# Altium PCB PyBoard_PCB.PcbDoc
Units mm, origin at the board's own origin, x right, y up, seen from the top; angles counter-clockwise.
Board outline 70.69 x 58.01 mm, 2 copper layers (Top Layer, Bottom Layer); 73 components, 78 nets, 257 pads, 65 vias.
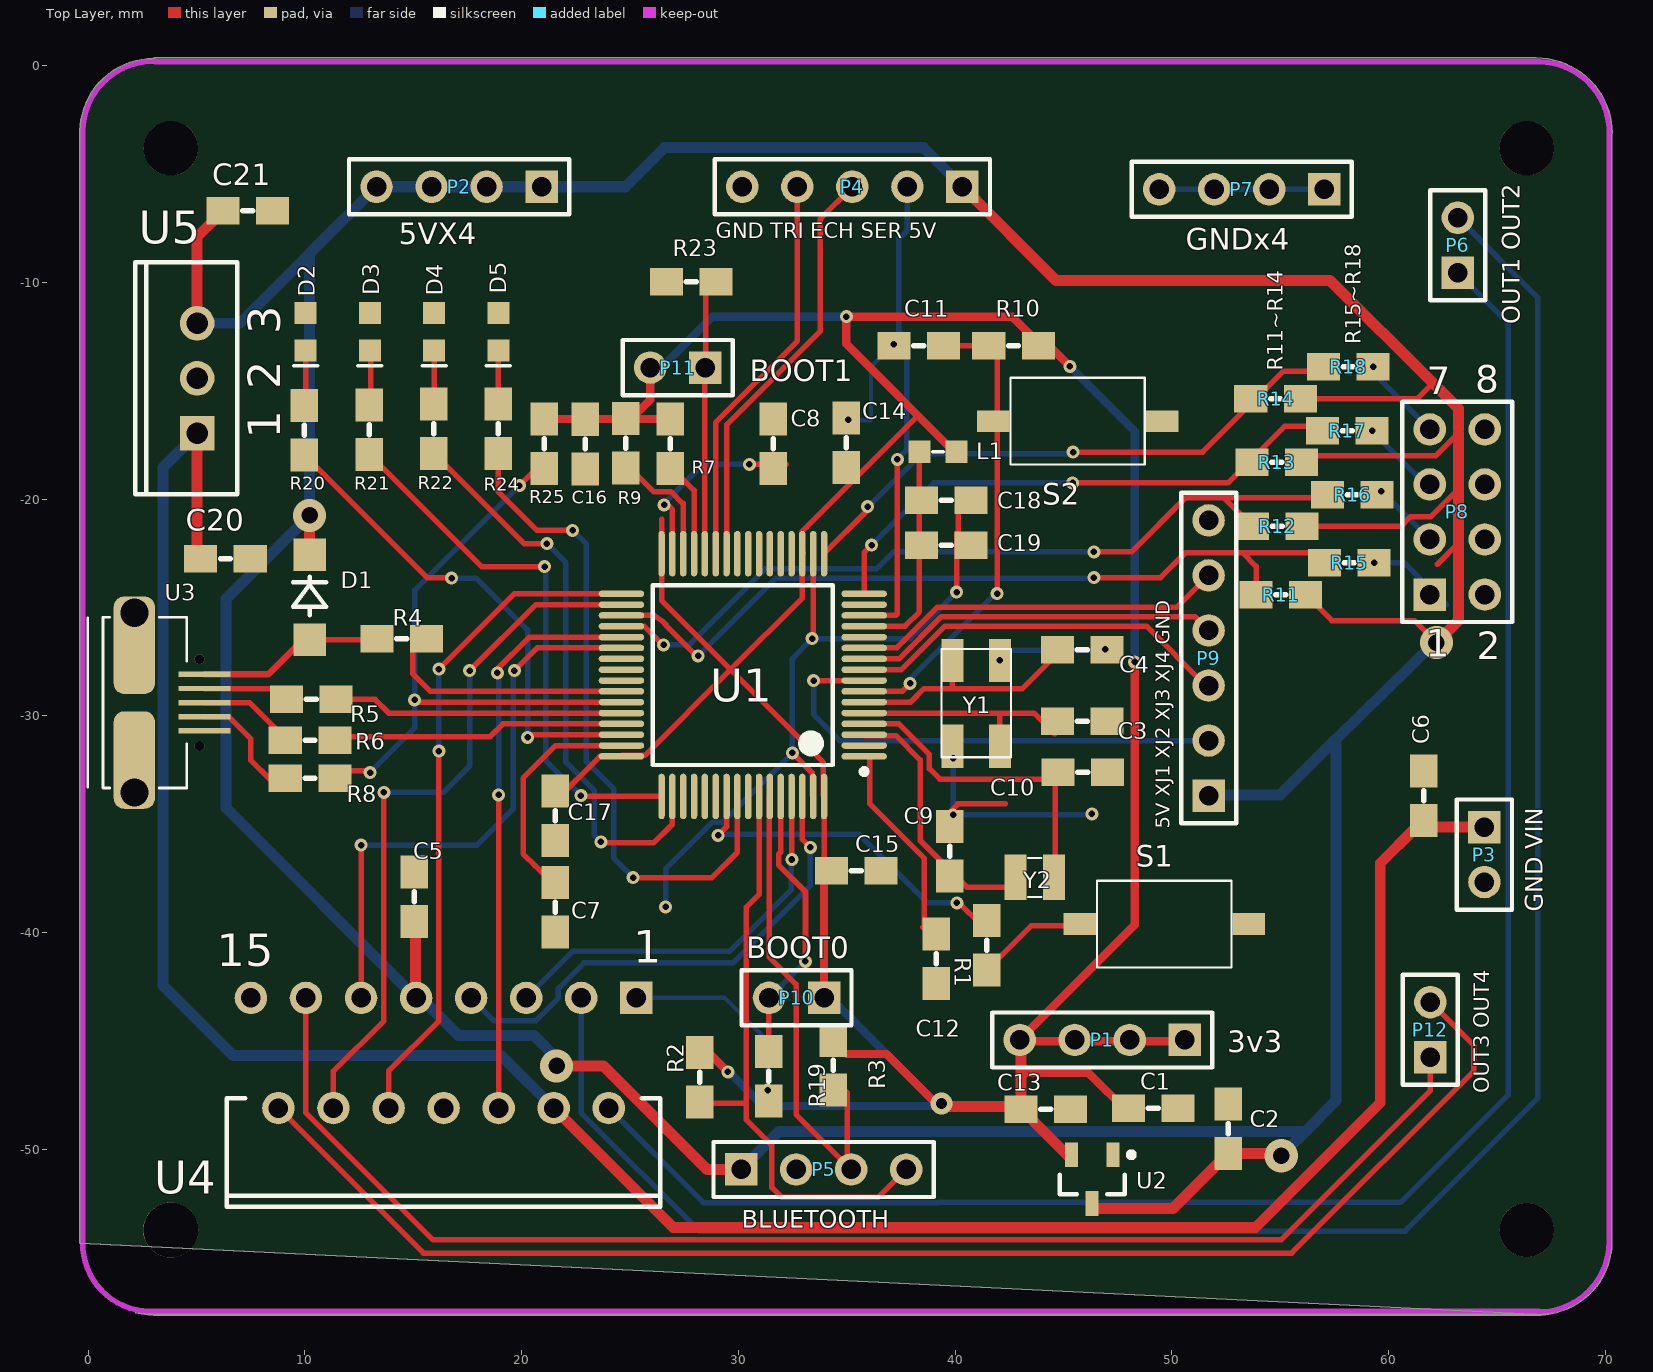
[diagram p0: Top Layer view]
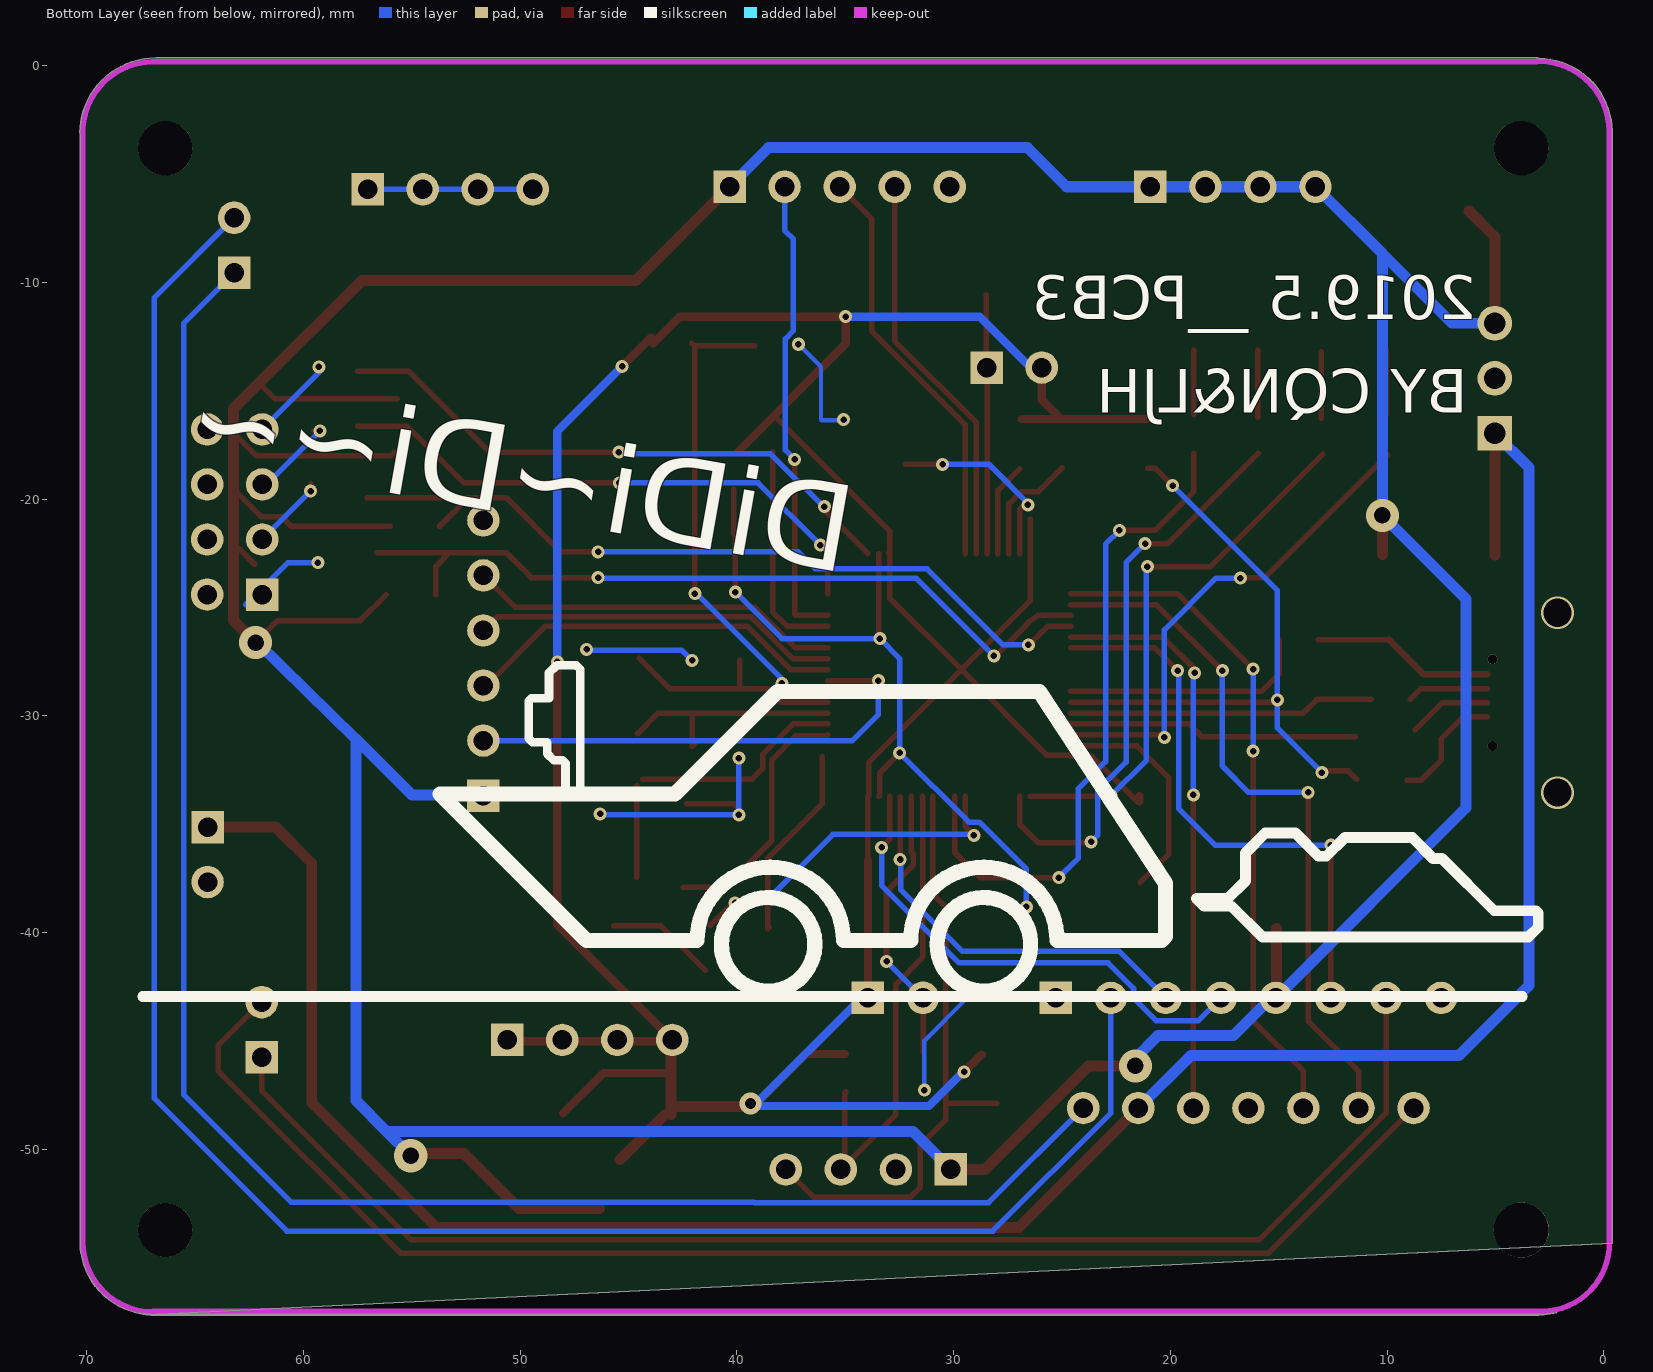
[diagram p1: Bottom Layer view, seen from below]

## Layer stack, top to bottom
Top Layer: signal copper 0.0356
Dielectric: dielectric 0.32, FR-4, Dk 4.8
Bottom Layer: signal copper 0.0356

## Board outline
-0.381,-54.323 cw(c-0.254,-54.319) -0.381,-54.319 -0.381,-2.997 cw(c-0.254,-2.997) -0.381,-2.995 cw(c3.01,-3.061) -0.286,-2.259 cw(c3.01,-3.061) 2.208,0.235 cw(c3.01,-3.061) 2.972,0.331 cw(c3.048,0.229) 3.03,0.355 cw(c3.048,0.229) 3.048,0.356 66.802,0.356 cw(c66.802,-3.175) 68.892,-0.329 cw(c66.916,-3.086) 70.075,-1.849 cw(c66.916,-3.086) 70.308,-3.086 cw(c66.916,-3.086) 70.308,-3.099 cw(c66.916,-3.086) 70.308,-3.151 cw(c66.916,-3.086) 70.308,-3.152 70.308,-3.151 70.308,-54.305 cw(c70.18,-54.305) 70.308,-54.308 cw(c66.916,-54.242) 70.212,-55.044 cw(c66.916,-54.242) 67.718,-57.537 cw(c66.916,-54.242) 66.878,-57.633 cw(c66.916,-54.242) 66.85,-57.633 cw(c66.853,-57.506) 66.773,-57.605 2.819,-57.605 cw(c2.819,-57.478) 2.817,-57.605 cw(c2.88,-54.344) 2.179,-57.53 ccw(c3.124,-54.127) 3.03,-57.657 ccw(c3.124,-54.127) 3.124,-57.658 ccw(c3.124,-57.531) 3.228,-57.605 3.048,-57.658 cw(c3.048,-57.531) 3.03,-57.657 cw(c3.048,-57.531) 2.944,-57.605 3.048,-57.658 66.802,-57.658 ccw(c66.802,-54.127) 67.718,-57.537 66.878,-57.633 cw(c66.802,-57.531) 66.802,-57.658 cw(c66.802,-57.531)

## Design rules (kind name [scope] priority, off if disabled: settings)
Clearance [All] p1: gap=0.178
PolygonConnect [All] p1: connectstyle=Relief reliefconductorwidth=0.254 reliefentries=4 polygonreliefangle="90 Angle"
RoutingVias [All] p1: holewidth=0.3 width=0.6 viastyle="Through Hole" minholewidth=0.2 minwidth=0.5 maxholewidth=1.27 maxwidth=3.81
SilkscreenOverComponentPads [All] p1: minsilkscreentomaskgap=0.254
SolderMaskExpansion [All] p1: expansion=0.102
TestPointUsage [All] p1: valid=0 allowmultiple=FALSE
Testpoint [All] p1: side=15 testpointundercomponent=TRUE minsize=1.016 maxsize=2.54 preferedsize=1.524 minholesize=0 maxholesize=1.016 preferedholesize=0.813 testpointgrid=0.025 style=1023 order=0123456789
Width [All] p1: maxlimit=0.508 minlimit=0.178 preferedwidth=0.203
23 further rules are at their usual default settings.

## Components (designator, comment, footprint, x,y, rotation, side; value= is the part's Value field where it differs from the comment)
C1 "4u7" SMD0805 50.275,-48.1 r180 top
C2 "2u2" SMD0805 52.596,-47.905 r270 top
C3 "18p" SMD0805 47,-30.25 r180 top
C4 "18p" SMD0805 47,-26.95 r180 top
C5 "100n" SMD0805 15.05,-37.2 r270 top
C6 "100n" SMD0805 61.625,-32.55 r270 top
C7 "4u7" SMD0805 21.55,-39.975 r90 top
C8 "4u7" SMD0805 31.6,-16.3 r270 top
C9 "2.2p" SMD0805 39.75,-35.1 r270 top
C10 "2.2p" SMD0805 47.025,-32.6 r180 top
C11 "104" SMD0805 37.175,-12.915 r0 top
C12 "104" SMD0805 39.125,-42.35 r90 top
C13 "2u2" SMD0805 45.325,-48.15 r180 top
C14 "104" SMD0805 34.975,-16.25 r270 top
C15 "104" SMD0805 36.575,-37.15 r180 top
C16 "104" SMD0805 22.936,-18.599 r90 top
C17 "104" SMD0805 21.55,-35.75 r90 top
C18 "4u7" SMD0805 38.445,-20.05 r0 top
C19 "104" SMD0805 38.445,-22.125 r0 top
C20 "0.33u" SMD0805 7.475,-22.75 r180 top
C21 "0.1u" SMD0805 8.5,-6.7 r180 top
D1 "Diode" "SS24 - SMALL" 10.211,-26.492 r90 top
D2 "LED RED" LED0603 10.025,-12.275 r90 top
D3 "LED GREEN" LED0603 12.992,-12.275 r90 top
D4 "LED Yellow" LED0603 15.958,-12.275 r90 top
D5 "LED Blue" LED0603 18.925,-12.275 r90 top
L1 "1uH" SMD0603 39.209,-17.813 r180 top
P1 "3v3" HDR1X4 50.596,-44.955 r180 top
P2 "5VX4" HDR1X4 20.921,-5.585 r180 top
P3 "GND VIN" HDR1X2 64.421,-35.13 r270 top
P4 "Header 5_SUPERVOICE" HDR1X5 40.336,-5.585 r180 top
P5 "BLUETOOTH" HDR1X4 30.121,-50.93 r0 top
P6 "OUT1 OUT2" HDR1X2 63.196,-9.555 r90 top
P7 "GNDx4" HDR1X4 57.035,-5.705 r180 top
P8 "Header 4X2_CARLIGHTS" HDR2X4 61.9,-24.4 r90 top
P9 "5V XJ1 XJ2 XJ3 XJ4 GND" HDR1X6 51.696,-33.68 r90 top
P10 "BOOT0" HDR1X2 33.951,-43.01 r180 top
P11 "BOOT1" HDR1X2 28.471,-13.93 r180 top
P12 "OUT3 OUT4" HDR1X2 61.925,-45.75 r90 top
R1 "10K" SMD0805 41.465,-41.729 r90 top
R2 "4K7" SMD0805 28.225,-45.525 r270 top
R3 "4K7" SMD0805 34.375,-44.975 r270 top
R4 "560" SMD0805 15.6,-26.45 r180 top
R5 "22" SMD0805 11.425,-29.235 r180 top
R6 "22" SMD0805 11.375,-31.125 r180 top
R7 "4K7" SMD0805 26.85,-16.3 r270 top
R8 "560" SMD0805 11.375,-32.875 r180 top
R9 "4K7" SMD0805 24.8,-16.275 r270 top
R10 "10K" SMD0805 41.55,-12.915 r0 top
R11 "4K7" SMD0805 56.175,-24.4 r180 top
R12 "4K7" SMD0805 56,-21.25 r180 top
R13 "4K7" SMD0805 55.975,-18.3 r180 top
R14 "4K7" SMD0805 55.925,-15.36 r180 top
R15 "50" SMD0805 57.05,-22.925 r0 top
R16 "50" SMD0805 57.175,-19.8 r0 top
R17 "50" SMD0805 56.95,-16.85 r0 top
R18 "50" SMD0805 57,-13.9 r0 top
R19 "10K" SMD0805 31.396,-45.491 r270 top
R20 "560" SMD0805 9.975,-15.675 r270 top
R21 "560" SMD0805 12.975,-15.65 r270 top
R22 "560" SMD0805 15.95,-15.6 r270 top
R23 "10K" SMD0805 28.975,-9.975 r180 top
R24 "560" SMD0805 18.925,-15.6 r270 top
R25 "10K" SMD0805 21.036,-18.585 r90 top
S1 "USER" "SW 3X6" 49.646,-39.605 r0 top
S2 "SW-PB" "SW 3X6" 45.65,-16.4 r0 top
U1 "STM32F405RGT6" LQFP64_M 30.201,-28.118 r180 top
U2 "XC6206" SOT-23_N 46.325,-51.375 r270 top
U3 "MicroUSB" MICROUSB -0.025,-29.388 r180 top
U4 "L298N" Multiwatt15V 16.396,-45.555 r180 top
U5 "LM7805" TO-220AB 5.025,-14.425 r90 top
Y1 "8M" SMD5032 40.973,-29.421 r270 top
Y2 "32K" TXC_9H03200019 43.675,-37.45 r0 top

## Footprints (in the part's own frame and the unit in brackets; to place one, negate y for a bottom-side part, rotate by r counter-clockwise, add the part's x,y. Pads: shape width x height; smd on the part's side, far side on the other; paste and mask are expansions set on the pad)
HDR1X2 [mm]
  rect 1.5x1.5 hole 0.9: 1(0,0)
  round 1.5 hole 0.9: 2(2.54,0)
  silkscreen extent -1.27,-1.27 3.81,1.27
HDR1X4 [mm]
  rect 1.5x1.5 hole 0.9: 1(0,0)
  round 1.5 hole 0.9: 2(2.54,0) 3(5.08,0) 4(7.62,0)
  silkscreen extent -1.27,-1.27 8.89,1.27
HDR1X5 [mm]
  rect 1.5x1.5 hole 0.9: 1(0,0)
  round 1.5 hole 0.9: 2(2.54,0) 3(5.08,0) 4(7.62,0) 5(10.16,0)
  silkscreen extent -1.27,-1.27 11.43,1.27
HDR1X6 [mm]
  rect 1.5x1.5 hole 0.9: 1(0,0)
  round 1.5 hole 0.9: 2(2.54,0) 3(5.08,0) 4(7.62,0) 5(10.16,0) 6(12.7,0)
  silkscreen extent -1.27,-1.27 13.97,1.27
HDR2X4 [mm]
  rect 1.5x1.5 hole 0.9: 1(0,0)
  round 1.5 hole 0.9: 2(0,-2.54) 3(2.54,0) 4(2.54,-2.54) 5(5.08,0) 6(5.08,-2.54) 7(7.62,0) 8(7.62,-2.54)
  silkscreen extent -1.27,-3.81 8.89,1.27
LED0603 [mil]
  rect 40x40 smd: 1(-34,0) 2(34,0)
  silkscreen extent -62,-22 -62,22
LQFP64_M [mm]
  oval 2.1x0.3 smd: 1(-5.6,3.75) 2(-5.6,3.25) 3(-5.6,2.75) 4(-5.6,2.25) 5(-5.6,1.75) 6(-5.6,1.25) 7(-5.6,0.75) 8(-5.6,0.25) 9(-5.6,-0.25) 10(-5.6,-0.75) 11(-5.6,-1.25) 12(-5.6,-1.75) 13(-5.6,-2.25) 14(-5.6,-2.75) 15(-5.6,-3.25) 16(-5.6,-3.75) 33(5.6,-3.75) 34(5.6,-3.25) 35(5.6,-2.75) 36(5.6,-2.25) 37(5.6,-1.75) 38(5.6,-1.25) 39(5.6,-0.75) 40(5.6,-0.25) 41(5.6,0.25) 42(5.6,0.75) 43(5.6,1.25) 44(5.6,1.75) 45(5.6,2.25) 46(5.6,2.75) 47(5.6,3.25) 48(5.6,3.75)
  oval 0.3x2.1 smd: 17(-3.75,-5.6) 18(-3.25,-5.6) 19(-2.75,-5.6) 20(-2.25,-5.6) 21(-1.75,-5.6) 22(-1.25,-5.6) 23(-0.75,-5.6) 24(-0.25,-5.6) 25(0.25,-5.6) 26(0.75,-5.6) 27(1.25,-5.6) 28(1.75,-5.6) 29(2.25,-5.6) 30(2.75,-5.6) 31(3.25,-5.6) 32(3.75,-5.6) 49(3.75,5.6) 50(3.25,5.6) 51(2.75,5.6) 52(2.25,5.6) 53(1.75,5.6) 54(1.25,5.6) 55(0.75,5.6) 56(0.25,5.6) 57(-0.25,5.6) 58(-0.75,5.6) 59(-1.25,5.6) 60(-1.75,5.6) 61(-2.25,5.6) 62(-2.75,5.6) 63(-3.25,5.6) 64(-3.75,5.6)
  silkscreen extent -5.72,-4.15 4.15,4.57, body extent -5,-5 5,5, height 1.6
MICROUSB [mm]
  rect 2.4x0.25 smd: 1(-5.4,-1.3) 2(-5.4,-0.65) 3(-5.4,0) 4(-5.4,0.65) 5(-5.4,1.3)
  rrect50% 1.9x4.5 smd: 6(-2.15,2.65) 7(-2.15,-2.65)
  round 0.457 hole 0.457 unplated: ""(-5.159,-2) ""(-5.159,2)
  silkscreen extent -4.57,-3.94 0,3.94
Multiwatt15V [mm] "TO, Thru-Hole, Vertical, Heatsink Mounted; 15 Bent Staggered Leads; Pitch 1.27 mm"
  rect 1.5x1.5 hole 0.9: 1(-8.89,-2.54)
  round 1.5 hole 0.9: 2(-7.62,2.54) 3(-6.35,-2.54) 4(-5.08,2.54) 5(-3.81,-2.54) 6(-2.54,2.54) 7(-1.27,-2.54) 8(0,2.54) 9(1.27,-2.54) 10(2.54,2.54) 11(3.81,-2.54) 12(5.08,2.54) 13(6.35,-2.54) 14(7.62,2.54) 15(8.89,-2.54)
  silkscreen extent -10,2.09 10,7.09
SMD0603 [mil]
  rect 40x40 smd: 1(-34,0) 2(34,0)
  silkscreen extent -10,0 10,0
SMD0805 [mil]
  rect 60x50 smd: 1(0,0) 2(90,0)
  silkscreen extent 36,0 54,0
SMD5032 [mm]
  rect 2x1 smd: 1(-1.98,-1.096) 2(1.98,-1.096) 3(1.98,1.096) 4(-1.98,1.096)
  silkscreen extent -2.51,-1.6 2.49,1.6, body extent -2.41,-1.52 2.41,1.52, height 0.8
SOT-23_N [mm]
  rect 1.15x0.6 smd: 1(-1.125,0.95) 2(-1.125,-0.95) 3(1.125,0)
  silkscreen extent -1.25,-1.5 0.7,1.93, body extent -0.7,-1.5 0.7,1.5, height 1.1
"SS24 - SMALL" [mm]
  rect 1.5x1.5 smd: 1(0,0) 2(3.937,0)
  silkscreen extent 1.14,-0.76 2.92,0.76, body extent -0.64,-0.89 4.57,0.89, height 3
"SW 3X6" [mm]
  rect 1.5x1 smd: 1(-3.9,0) 2(3.9,0)
  silkscreen extent -3.1,-2 3.1,2
TO-220AB [mm]
  rect 1.6x1.6 hole 1: 1(-2.54,0)
  round 1.6 hole 1: 2(0,0) 3(2.54,0)
  silkscreen extent -5.35,-1.85 5.35,2.85
TXC_9H03200019 [mm]
  rect 1x2.1 smd: 1(-0.889,0) 2(0.889,0)
  silkscreen extent -0.3,-0.9 0.3,0.9, body extent -1.4,-0.89 1.4,0.89, height 0.8

## Part data
C1 C2 C5 C6 C7 C8 C9 C10 C11 C12 C13 C14 C15 C16 C17 C18 C19 C20 C21: library part Cap, "Capacitor"
C3 C4: library part Cap
D1: "Default Diode"
D2: library part LED-RED, "红色发光二极管"
D3: library part LED-GREEN, "绿色发光二极管"
D4: library part LED-YELLOW, "黄色发光二极管"
D5: library part LED-BLUE, "蓝色发光二极管"
L1: library part Inductor, "Inductor"
P1 P2 P5 P7: library part "Header 4", "Header, 4-Pin"
P3 P6 P10 P11 P12: library part "Header 2", "Header, 2-Pin"
P4: library part "Header 5", "Header, 5-Pin"
P8: library part "Header 4X2", "Header, 4-Pin, Dual row"
P9: library part "Header 6", "Header, 6-Pin"
R1 R2 R3 R4 R5 R6 R7 R8 R9 R10 R11 R12 R13 R14 R15 R16 R17 R18 R19 R20 R21 R22 R23 R24 R25: library part Res, "Resistor"
S1: library part SW-PB, "Switch"
S2: "Switch"
U1: "ARM Cortex-M4 32-bit MCU+FPU, 210 DMIPS, 1024 kB Flash, 192 kB Internal RAM, 51 I/Os, 64-pin LQFP, -40 to 85 degC, Tray"
U4: "Dual Full Bridge Driver"
Y1: library part XTAL_SMD, "SMD5032 8M 4Pin有源晶振"
Y2: library part XTAL, "Crystal Oscillator"

## Free pads (board coordinates)
  round 2.5 hole 2.5: 2(66.37,-53.721) 4(3.81,-3.81) 5(66.37,-3.81)
  round 2.54 hole 2.54: 3(3.81,-53.721)

## Via types
v1: diameter 0.6, hole 0.3, Top Layer to Bottom Layer, 58 vias
v2: diameter 1.524, hole 0.762, Top Layer to Bottom Layer, 3 vias
v3: diameter 1.5, hole 1.3, Top Layer to Bottom Layer, 2 vias
v4: diameter 1.016, hole 0.508, Top Layer to Bottom Layer, 1 vias
v5: diameter 1.534, hole 0.762, Top Layer to Bottom Layer, 1 vias

## Nets (pads, with @x,y where several pads share a name; then routed paths per layer and width w, separated by ;. In a path a pad name is that pad's centre, name@x,y a point inside that pad or via, vN(x,y) a via of type N, cw(c..) or ccw(c..) an arc to the next point about the centre after c; other vN are vias at no path point)
3V3: C1.2 C13.2 C14.2 C15.2 C16.2 C17.2 L1.1 P1.1 P1.2 P1.3 P1.4 P10.1 P11.2 R2.1 R3.1 R7.1 R9.1 R10.2 R25.2 U1.19 U1.32 U1.48 U1.64 U2.2 | length 170
  Top Layer w0.254: C17.2@21.515,-33.962 23.609,-31.868 U1.48 24.646,-31.823 25.689,-31.823 29.644,-27.868 ; 26.451,-20.931 U1.32 26.451,-24.675 29.644,-27.868 ; U1.19@32.996,-22.473 U1.19 ; U1.64@33.905,-33.673 33.905,-32.129 29.644,-27.868 ; C15.2@33.951,-36.678 U1.64 ; 38.262,-16.163 32.951,-21.475 U1.19 ; 29.644,-27.868 32.951,-24.561 U1.19
  Top Layer w0.381: R25.2 R7.1@26.849,-16.299 ; C17.2@21.421,-33.941 C17.2@21.421,-33.697 ; R9.1@25.075,-16.275 25.931,-15.419 P11.2 ; R2.1@28.704,-45.621 v1(29.515,-46.431) ; P10.1 C15.2@33.951,-36.678 ; 35.01,-45.596 36.833,-45.596 v4@39.116,-47.879 ; v4(39.37,-47.879) v4@39.522,-48.031 ; L1.1@39.945,-17.813 34.976,-12.843 v1(34.976,-11.582) 40.361,-11.582 42.63,-11.582 R10.2@43.863,-12.815 ; P1.4@43.025,-45.005 P1.4 48.285,-39.645 v1(48.285,-27.508) ; P1.4@43.035,-45.014 48.056,-45.014 P1.1@50.537,-45.014 ; 43.06,-46.482 46.162,-46.482 C1.2@48.01,-48.33 ; R10.2@43.958,-12.538 v1(45.288,-13.868)
  Top Layer w0.5: v4@39.522,-48.031 C13.2@42.661,-48.031 ; C13.2@43.035,-48.405 P1.4@43.035,-45.014 ; C13.2@43.315,-48.405 U2.2@45.39,-50.479
  Bottom Layer w0.381: P11.2@26.45,-13.93 28.797,-11.582 v1(34.976,-11.582) ; v1(29.515,-46.431) 29.556,-46.431 31.131,-48.006 39.243,-48.006 P10.1@34.267,-43.03 ; v1(45.288,-13.868) 48.285,-16.866 v1(48.285,-27.508)
5V: C2.2 C5.2 C21.2 D1.2 P2.1 P2.2 P2.3 P2.4 P4.1 P5.1 P9.1 R11.1 R12.1 R13.1 R14.1 U2.3 U4.9 U5.3 | length 248
  Top Layer w0.254: R13.1@55.654,-17.985 R13.1@55.804,-17.835 ; R14.1@55.679,-15.36 R14.1 61.331,-15.36 62.044,-14.647 ; R13.1@55.975,-18.004 62.168,-18.004 63.221,-16.951 63.221,-16.789 ; R12.1 60.573,-21.25 61.018,-20.805 61.948,-20.805 63.195,-19.558 ; R11.1 57.378,-25.603 61.189,-25.603 v2(62.205,-26.619) ; 62.244,-23.008 63.221,-22.031
  Top Layer w0.5: U5.3 5.025,-7.889 C21.2
  Top Layer w0.508: D1.2 v2(10.211,-20.752) ; U4.9@15.096,-42.985 C5.2@15.096,-39.818 ; v2(21.615,-46.152) 23.774,-46.152 28.552,-50.93 P5.1 ; P4.1@40.959,-6.208 P4.1 44.657,-9.906 57.302,-9.906 62.044,-14.647 63.221,-15.824 63.221,-16.789 ; U2.3@46.34,-52.729 50.057,-52.729 C2.2 54.585,-50.191 54.686,-50.292 v5@54.762,-50.292 ; v2(62.205,-26.619) 63.221,-25.603 63.221,-22.031 63.221,-16.951
  Bottom Layer w0.5: U5.3 7.001,-11.885 10.211,-8.675
  Bottom Layer w0.508: v2(21.615,-46.152) 21.615,-45.796 20.574,-44.755 17.087,-44.755 15.347,-43.015 U4.9 6.35,-34.239 6.35,-24.613 v2(10.211,-20.752) 10.211,-8.675 P2.4 P2.3 P2.2 P2.1 24.551,-5.585 24.79,-5.585 26.591,-3.785 38.535,-3.785 P4.1 ; P5.1 31.876,-49.174 56.159,-49.174 ; P9.1@51.72,-33.655 54.991,-33.655 57.582,-31.064 ; v5(55.042,-50.292) 56.159,-49.174 ; v2@62.154,-26.594 57.582,-31.064 ; 56.159,-49.174 57.582,-47.752 57.582,-31.064
BOOT0: P10.2 R19.1 U1.60 | length 13
  Top Layer w0.254: R19.1 P10.2@31.396,-43.025 ; U1.60 31.951,-36.282 31.856,-36.376 31.856,-36.877 33.095,-38.116 v1(33.095,-41.326)
  Bottom Layer w0.254: P10.2 v1(33.095,-41.326)
GND: C1.1 C2.1 C3.1 C4.1 C5.1 C6.1 C7.1 C8.1 C9.1 C10.1 C11.1 C12.1 C13.1 C14.1 C15.1 C16.1 C17.1 C18.2 C19.2 C20.1 C21.1 D2.2 D3.2 D4.2 D5.2 P3.2 P4.5 P5.2 P7.1 P7.2 P7.3 P7.4 P8.2 P8.4 P8.6 P8.8 P9.6 R19.2 R23.2 S1.2 S2.2 U1.12 U1.18 U1.63 U2.1 U3.5 U3.6 U3.7 U4.1 U4.8 U4.15 U5.2 Y1.2 Y1.4 | length 72.8
  Top Layer w0.203: v1(31.345,-47.269) R19.2@31.396,-47.218 ; v1(37.16,-12.852) 37.16,-12.875 37.2,-12.915 C11.1@37.371,-12.915
  Top Layer w0.254: v1(32.487,-31.711) 33.405,-32.629 33.405,-33.673 U1.63 ; v1(33.4,-26.44) 33.451,-26.44 U1.18 ; v1(39.903,-34.569) 39.867,-34.533 39.867,-34.323 40.131,-34.059 42.317,-34.059 ; v1(40.072,-24.291) C19.2@40.072,-21.565 ; C19.2@40.138,-21.565 C18.2@40.138,-19.54
  Bottom Layer w0.203: U4.1 29.375,-43.015 31.345,-44.984 v1(31.345,-47.269) ; v1(35.077,-16.332) 35.103,-16.358 36.093,-16.358 36.119,-16.332 36.119,-13.894 v1(37.16,-12.852)
  Bottom Layer w0.254: v1(26.645,-38.811) 26.645,-37.067 28.807,-34.904 29.293,-34.904 v1(32.487,-31.711) 32.487,-30.074 32.487,-27.353 v1(33.4,-26.44) 37.923,-26.44 v1(40.072,-24.291) ; v1(39.903,-34.569) 46.253,-34.569 v1(46.304,-34.519) ; v1@39.903,-34.287 v1(39.903,-31.953) ; v1(42.069,-27.441) 42.549,-26.962 v1@46.872,-26.962 ; P7.4 P7.3 P7.2 P7.1
  other v1: 46.931,-26.937
  other v3: 2.134,-33.538 2.134,-25.238
L298N_OUT1: P6.1 U4.2 | length 84.3
  Bottom Layer w0.254: U4.2 28.38,-52.46 39.203,-52.46 39.211,-52.451 60.554,-52.451 65.515,-47.489 65.515,-11.875 P6.1
L298N_OUT2: P6.2 U4.3 | length 96.4
  Bottom Layer w0.254: U4.3 22.746,-48.317 28.201,-53.772 60.757,-53.772 66.878,-47.65 66.878,-10.697 P6.2
L298N_OUT3: P12.1 U4.13 | length 64
  Top Layer w0.254: U4.13 10.046,-48.317 15.907,-54.178 55.042,-54.178 61.925,-47.295 P12.1
L298N_OUT4: P12.2 U4.14 | length 65.4
  Top Layer w0.254: U4.14 15.469,-54.788 55.528,-54.788 63.932,-46.384 63.932,-45.217 P12.2
NetC3_2: C3.2 U1.5 Y1.3 | length 10.9
  Top Layer w0.254: U1.5 43.628,-29.868 C3.2@44.587,-30.827 ; Y1.3@41.936,-31.269 Y1.3 42.069,-29.912
NetC4_2: C4.2 U1.6 Y1.1 | length 12
  Top Layer w0.254: U1.6@36.844,-29.368 U1.6 37.95,-29.368 38.572,-28.746 43.101,-28.746 C4.2@44.512,-27.335 ; 39.877,-28.722 Y1.1 Y1.1@39.877,-27.528
NetC7_2: C7.2 U1.47 | length 10.5
  Top Layer w0.254: C7.2@21.396,-37.694 20.608,-36.906 20.066,-36.364 20.066,-32.868 21.566,-31.368 U1.47
NetC8_2: C8.2 U1.31 | length 9.1
  Top Layer w0.254: v1(26.568,-20.269) 26.568,-20.193 26.67,-20.193 26.951,-20.474 U1.31 ; v1(30.505,-18.39) C8.2@32.207,-18.39
  Bottom Layer w0.254: v1(26.568,-20.269) 26.568,-20.193 28.372,-18.39 v1(30.505,-18.39)
NetC9_2: C9.2 U1.3 Y2.1 | length 11.8
  Top Layer w0.254: U1.3 35.846,-30.913 37.263,-30.913 38.379,-32.029 38.379,-35.738 40.538,-37.897 41.25,-37.897 Y2.1@42.469,-37.897
NetC10_2: C10.2 U1.4 Y2.2 | length 14.2
  Top Layer w0.254: U1.4 37.404,-30.368 38.811,-31.775 38.811,-32.436 39.294,-32.918 C10.2@44.348,-32.918 ; Y2.2@44.612,-37.45 C10.2@44.612,-33.235
NetC11_2: C11.2 R10.1 S2.1 U1.7 | length 22.5
  Top Layer w0.254: U1.7 37.553,-28.868 v1(37.922,-28.499) ; C11.2@39.163,-12.915 R10.1@41.971,-12.915 ; v1(41.935,-24.359) 41.935,-12.95 R10.1@41.971,-12.915 ; R10.1@42.071,-12.815 R10.1@41.971,-12.915
  Bottom Layer w0.254: v1(37.922,-28.499) 37.922,-28.299 41.863,-24.359 v1(41.935,-24.359)
NetC18_1: C18.1 C19.1 L1.2 U1.13 | length 10.2
  Top Layer w0.254: U1.13@35.811,-25.857 37.694,-25.857 38.345,-25.206 L1.2
NetD2_1: D2.1 R20.1 | length 3
  Top Layer w0.254: R20.1@10.025,-16.111 D2.1
NetD3_1: D3.1 R21.1 | length 3.1
  Top Layer w0.254: R21.1@13.043,-16.271 D3.1@13.043,-13.19
NetD4_1: D4.1 R22.1 | length 3.1
  Top Layer w0.254: R22.1@15.958,-16.214 D4.1
NetD5_1: D5.1 R24.1 | length 3
  Top Layer w0.254: R24.1@18.925,-16.106 D5.1
NetP8_1: P8.1 R15.2 | length 4.4
  Bottom Layer w0.254: v1(59.336,-22.925) 60.72,-22.925 62.662,-24.867 ; P8.1 P8.1@61.9,-24.105
NetP8_3: P8.3 R16.2 | length 3.5
  Top Layer w0.254: v1(59.665,-19.625) R16.2@59.665,-19.292
  Bottom Layer w0.254: v1(59.665,-19.625) P8.3
NetP8_5: P8.5 R17.2 | length 3.8
  Top Layer w0.254: v1(59.236,-16.85) R17.2@59.522,-16.85
  Bottom Layer w0.254: v1(59.236,-16.85) P8.5@61.706,-19.32
NetP8_7: P8.7 R18.2 | length 3.7
  Bottom Layer w0.254: v1@59.286,-14.166 P8.7
  other v1: 59.286,-13.9
NetR1_1: R1.1 S1.1 | length 5.1
  Top Layer w0.254: R1.1 43.514,-39.68 S1.1@45.671,-39.68
NetR5_2: R5.2 U3.2 | length 3.8
  Top Layer w0.254: U3.2 8.44,-28.738 R5.2@8.937,-29.235
NetR6_2: R6.2 U3.3 | length 3.8
  Top Layer w0.254: U3.3 7.442,-29.388 R6.2@8.687,-30.632
NetR8_2: R8.2 U3.4 | length 5.5
  Top Layer w0.254: U3.4 6.481,-30.038 7.493,-31.05 7.493,-32.041 8.421,-32.969 R8.2@9.068,-32.969
PA0_X1_SERVO: P4.2 U1.14 | length 21.9
  Top Layer w0.254: U1.14 37.269,-25.368 37.338,-25.298 v1(37.338,-18.161)
  Bottom Layer w0.254: v1(37.338,-18.161) 37.765,-17.734 37.765,-12.602 37.389,-12.226 37.389,-8.001 37.796,-7.594 P4.2 ; P4.2@37.492,-5.815 P4.2@37.567,-5.815
PA1_X2: U1.15
PA2_X3_LEFTL: R13.2 R17.1 U1.16 | length 26
  Top Layer w0.254: U1.16 35.801,-22.467 v1(36.144,-22.123) ; v1(45.415,-19.253) 52.594,-19.253 53.862,-17.985 55.207,-16.64 R17.1@57.496,-16.64
  Bottom Layer w0.254: v1(36.144,-22.123) 39.014,-19.253 v1(45.415,-19.253)
PA3_X3_RIGHTL: R14.2 R18.1 U1.17 | length 26.9
  Top Layer w0.254: U1.17 v1@35.966,-20.502 ; v1(45.441,-17.831) 51.416,-17.831 53.887,-15.36 55.157,-14.09 R18.1@57.496,-14.09
  Bottom Layer w0.254: v1(35.966,-20.345) 36.009,-20.345 38.447,-17.907 v1@45.39,-17.907
PA4_X5: U1.20
PA5_X6: U1.21
PA6_X7: U1.22
PA7_X8: U1.23
PA8_SDIO_SW: U1.41
PA9_VSUB: R4.1 U1.42 | length 11.5
  Top Layer w0.254: R4.1@14.979,-26.485 14.979,-28.06 15.773,-28.854 U1.42@24.587,-28.854
PA10_ID: R8.1 R25.1 U1.43 | length 29
  Top Layer w0.254: R8.1@11.392,-32.931 11.397,-32.931 11.791,-32.537 12.929,-32.537 v1(13.005,-32.614) ; v1(15.062,-29.261) 15.169,-29.368 U1.43 ; v1(19.888,-19.38) 20.683,-18.585 R25.1
  Bottom Layer w0.254: v1(13.005,-32.614) 15.062,-30.556 v1(15.062,-29.261) 15.062,-24.206 v1(19.888,-19.38)
PA11_DM: R5.1 U1.44 | length 14.1
  Top Layer w0.254: R5.1@10.729,-29.235 13.232,-29.235 13.865,-29.868 U1.44
PA12_DP: R6.1 U1.45 | length 13.4
  Top Layer w0.254: R6.1@11.455,-30.963 18.542,-30.963 19.137,-30.368 U1.45
PA13_P5_RED: R20.2 U1.46 | length 22.9
  Top Layer w0.254: R20.2 15.636,-23.622 v1@16.662,-23.622 ; v1(20.269,-30.988) 20.389,-30.868 U1.46
  Bottom Layer w0.254: v1(16.764,-23.647) 17.882,-23.647 20.269,-26.035 v1(20.269,-30.988)
PA14_P4_GRN: R21.2 U1.49 | length 25.2
  Top Layer w0.254: R21.2 18.153,-23.114 v1(21.057,-23.114) ; v1(22.733,-33.68) 22.77,-33.718 U1.49
  Bottom Layer w0.254: v1@21.107,-23.114 21.107,-32.055 v1(22.733,-33.68)
PA15_P3_YEL: R22.2 U1.50 | length 26.7
  Top Layer w0.254: R22.2 20.111,-22.047 v1(21.158,-22.047) ; v1(23.647,-35.814) 23.698,-35.865 26.086,-35.865 26.951,-35 U1.50
  Bottom Layer w0.254: v1(21.158,-22.047) 22.039,-22.928 22.039,-32.131 23.338,-33.43 23.338,-35.504 v1(23.647,-35.814)
PB0_Y11_ECHO: P4.3 U1.26 | length 19.3
  Top Layer w0.254: U1.26 29.451,-16.574 33.771,-12.254 33.771,-7.07 P4.3
PB1_Y12_TRIG: P4.4 U1.27 | length 18.5
  Top Layer w0.254: U1.27 28.951,-16.464 32.716,-12.698 P4.4
PB2_BOOT1: P11.1 R23.1 U1.28 | length 11.9
  Top Layer w0.254: U1.28 P11.1@28.451,-13.95 ; P11.1@28.484,-13.916 R23.1@28.484,-10.566
PB3_X17_SW: R1.2 U1.55 | length 15.8
  Top Layer w0.254: v1(29.058,-35.509) 29.451,-35.116 U1.55 ; v1(40.081,-38.633) 40.186,-38.633 R1.2@41.232,-39.68
  Bottom Layer w0.254: v1@29.104,-35.463 35.565,-35.463 38.735,-38.633 v1(40.081,-38.633)
PB4_P2_BLUE: R24.2 U1.56 | length 31
  Top Layer w0.254: R24.2 18.925,-19.662 20.701,-21.438 v1(22.352,-21.438) ; v1(25.146,-37.465) 28.778,-37.465 29.951,-36.293 U1.56
  Bottom Layer w0.254: v1(22.352,-21.438) 22.987,-22.073 22.987,-32.106 24.252,-33.371 24.252,-36.571 v1(25.146,-37.465)
PB5: U1.57
PB6_X9_TX: P5.4 R2.2 U1.58 | length 28
  Top Layer w0.254: R2.2@28.016,-47.868 30.345,-47.868 ; U1.58 30.951,-38.239 30.356,-38.834 30.356,-46.137 30.356,-48.625 31.547,-49.816 31.547,-51.765 32.004,-52.222 34.442,-52.222 36.448,-52.222 P5.4
PB7_X10_RX: P5.3 R3.2 U1.59 | length 22.2
  Top Layer w0.254: U1.59 31.425,-33.744 31.425,-41.147 32.664,-42.387 32.664,-48.394 P5.3@35.01,-50.739 ; R3.2@34.968,-47.346 35.01,-47.388 P5.3@35.01,-50.739 ; P5.3 P5.3@35.01,-50.739
PB8_Y3: U1.61 U4.5 | length 18.5
  Top Layer w0.254: v1(32.461,-36.627) U1.61@32.461,-33.728
  Bottom Layer w0.254: U4.5 22.352,-40.869 29.591,-40.869 32.436,-38.024 v1@32.436,-36.678
PB9_Y4: U1.62 U4.7 | length 23.2
  Top Layer w0.254: U1.62 32.951,-35.694 v1(33.325,-36.068)
  Bottom Layer w0.254: U4.7 18.72,-44.07 20.643,-44.07 21.691,-43.021 21.691,-42.578 22.867,-41.402 29.743,-41.402 33.325,-37.821 v1(33.325,-36.068)
PB10_Y9_SCL: R7.2 U1.29 | length 4.3
  Top Layer w0.254: R7.2@26.943,-18.586 27.951,-19.594 U1.29
PB11_Y10_SDA: R9.2 U1.30 | length 5.5
  Top Layer w0.254: R9.2@24.997,-18.561 26.089,-19.653 26.884,-19.653 27.426,-20.195 27.451,-20.195 U1.30
PB12_Y5: U1.33 U4.10 | length 31.1
  Top Layer w0.254: U4.10 13.856,-46.394 16.18,-44.07 v1(16.18,-31.624) ; v1(16.18,-27.839) 19.652,-24.368 19.888,-24.368 U1.33
  Bottom Layer w0.254: v1(16.18,-31.624) v1(16.18,-27.839)
PB13_Y6: U1.34 U4.12 | length 32.6
  Top Layer w0.254: U4.12 11.316,-46.394 13.64,-44.07 v1(13.64,-33.529) ; v1(17.602,-27.915) 20.649,-24.868 U1.34
  Bottom Layer w0.254: v1(13.64,-33.529) 16.382,-33.529 17.602,-32.309 v1@17.602,-27.94
PB14_Y7_HEADL: R11.2 R15.1 U1.35 | length 36.7
  Top Layer w0.254: U1.35 26.104,-25.368 26.492,-25.629 26.645,-25.781 ; 26.645,-25.806 v1@28.067,-27.229 ; v1(46.406,-23.622) 49.484,-23.622 50.641,-22.465 53.25,-22.465 ; R11.2 53.889,-23.104 53.25,-22.465 ; R15.1@56.59,-22.465 53.25,-22.465
  Bottom Layer w0.254: v1(28.143,-27.229) 31.725,-23.647 v1@46.279,-23.647
PB15_Y8_STOPL: R12.2 R16.1 U1.36 | length 37.5
  Top Layer w0.254: U1.36 25.665,-25.868 v1@26.518,-26.721 ; v1(46.406,-22.428) 48.138,-22.428 50.641,-19.925 52.389,-19.925 ; R12.2 52.389,-19.925 ; R16.1@57.05,-19.925 52.389,-19.925
  Bottom Layer w0.254: v1(26.543,-26.721) 27.711,-26.721 31.217,-23.216 36.373,-23.216 37.16,-22.428 v1(46.406,-22.428)
PC0_X19_XJ1: P9.2 U1.8 | length 22.6
  Top Layer w0.254: v1(33.473,-28.368) U1.8
  Bottom Layer w0.254: v1(33.473,-28.368) 33.473,-29.943 34.67,-31.14 P9.2
PC1_X20_XJ2: P9.3 U1.9 | length 17.9
  Top Layer w0.254: U1.9 37.519,-27.868 39.53,-25.857 48.819,-25.857 51.561,-28.6 P9.3
PC2_X21_XJ3: P9.4 U1.10 | length 17
  Top Layer w0.254: U1.10 37.409,-27.368 39.351,-25.425 51.061,-25.425 P9.4
PC3_X22_XJ4: P9.5 U1.11 | length 17.3
  Top Layer w0.254: U1.11 37.298,-26.868 39.172,-24.994 50.222,-24.994 P9.5
PC4_X11: U1.24
PC5_X12: U1.25
PC6_Y1: U1.37 U4.6 | length 26.6
  Top Layer w0.254: v1(18.872,-28.016) 18.872,-27.847 20.351,-26.368 U1.37 ; U4.6 v1(18.936,-33.642)
  Bottom Layer w0.254: v1(18.936,-33.642) v1@18.936,-28.054
PC7_Y2: U1.38 U4.11 | length 26.3
  Top Layer w0.254: U4.11 v1(12.586,-35.966) ; v1(19.66,-27.915) 20.706,-26.868 U1.38
  Bottom Layer w0.254: v1(12.586,-35.966) 17.932,-35.966 19.609,-34.29 v1@19.609,-28.118
PC8_SDIO_D0: U1.39
PC9_SDIO_D1: U1.40
PC10_SDIO_D2: U1.51
PC11_SDIO_D3: U1.52
PC12_SDIO_CK: U1.53
PC13_X18: U1.2
PD2: U1.54
VBAT: C12.2 U1.1 | length 9.1
  Top Layer w0.254: U1.1@36.068,-31.877 36.068,-34.061 38.571,-36.564 38.571,-39.816 C12.2@38.499,-39.745
VBUS: D1.1 R4.2 U3.1 | length 8.3
  Top Layer w0.254: D1.1@10.057,-26.492 D1.1 R4.2@13.18,-26.492
  Top Layer w0.3: U3.1 8.311,-28.088 D1.1@9.906,-26.492
VIN: C6.2 C20.2 P3.1 U4.4 U5.1 | length 111.4
  Top Layer w0.5: C20.2@5.025,-22.586 U5.1 ; U4.4 26.99,-53.609 53.848,-53.609 ; 53.848,-53.619 59.614,-47.854 59.614,-36.826 ; 59.614,-36.8 C6.2@61.221,-35.193 ; C6.2@61.284,-35.13 P3.1
  Bottom Layer w0.5: U5.1 3.454,-18.536 3.454,-42.443 6.68,-45.669 19.05,-45.669 U4.4
pads on no net: U3.
copper on no net: | length 13.1
  Bottom Layer w0.254: 2495.194,2427.275 2508.326,2427.275

## Polygon pours and split planes (outlines as drawn)
GND on Top Layer "Bottom Layer-No Net" (hatched 45Degree grid 0.508 track 0.203, pour order 1000): 88.914,-40.244 88.914,-75.573 ccw(c91.454,-75.573) 91.454,-78.113 94.73,-78.113 156.808,-78.113 ccw(c156.808,-75.573) 159.348,-75.573 159.348,-71.207 159.348,-22.997 ccw(c156.808,-22.997) 156.808,-20.457 152.896,-20.457 91.454,-20.457 ccw(c91.454,-22.997) 88.914,-22.997 88.914,-40.447
GND on Bottom Layer "Bottom Layer-No Net" (solid, pour order 1000): 88.872,6.236 88.872,-29.093 ccw(c91.412,-29.093) 91.412,-31.633 94.688,-31.633 156.766,-31.633 ccw(c156.766,-29.093) 159.306,-29.093 159.306,-24.726 159.306,23.483 ccw(c156.766,23.483) 156.766,26.023 152.854,26.023 91.412,26.023 ccw(c91.412,23.483) 88.872,23.483 88.872,6.033

## Keep-outs
Keep-Out Layer:
  lines w0.254: -0.254,-54.319 -0.254,-2.997 cw(c3.01,-3.061) 3.073,0.203 ; -0.253,-54.283 ccw(c2.88,-54.344) 2.819,-57.478 66.927,-57.478 ; 3.099,0.178 66.98,0.178 cw(c66.916,-3.086) 70.18,-3.15 ; 66.853,-57.506 ccw(c66.916,-54.242) 70.18,-54.305 70.18,-3.099

## Silkscreen, mask and mechanical layers (free items; w line width, h text height)
Top Overlay:
  text "GND TRI ECH SER 5V" at 28.956,-7.95 h0.7
  text "R15~R18" at 58.725,-12.852 h0.7 r90
  text "R11~R14" at 55.118,-14.072 h0.7 r90
Bottom Overlay:
  circle w0.7: c38.556,-40.538 r2.158
  circle w0.7: c28.599,-40.538 r2.158
  lines w0.4: 47.219,-33.604 47.219,-27.864 47.422,-27.661 48.311,-27.661 48.666,-28.016 48.666,-29.185 49.479,-29.185 49.606,-29.312 49.606,-31.039 49.428,-31.217 48.768,-31.217 48.743,-31.242 48.743,-31.75 48.438,-32.055 48.031,-32.055 47.904,-32.182 47.904,-33.604
  lines w0.5: 3.759,-42.951 67.412,-42.951 ; 3.023,-39.751 3.023,-39.091 3.124,-38.989 3.581,-38.989 5.055,-38.989 7.468,-36.576 7.874,-36.576 8.839,-35.611 11.938,-35.611 12.802,-36.474 13.157,-36.474 14.224,-35.408 15.621,-35.408 16.535,-36.322 16.535,-37.617 17.348,-38.43 18.796,-38.43 18.44,-38.786 17.17,-38.786 15.748,-40.208 14.148,-40.208 3.48,-40.208 3.023,-39.751
  lines w0.7: 20.218,-40.183 20.396,-40.361 25.228,-40.361 cw(c28.603,-40.361) 31.979,-40.361 35.083,-40.361 cw(c38.459,-40.361) 41.834,-40.361 46.939,-40.361 53.696,-33.604 47.473,-33.604 42.85,-33.604 38.125,-28.88 26.035,-28.88 20.218,-37.719 20.218,-40.183
  text "2019.5 __PCB3" at 5.893,-11.709 h2
  text "BY CQN&LJH" at 6.274,-16.002 h2
  text "DiDi~Di~~" at 35.027,-23.419 h4 r10
Mechanical 1:
  lines w0.254: 3.048,-57.531 66.802,-57.531 ccw(c66.802,-54.127) 70.206,-54.127 ; 3.048,0.229 66.802,0.229 cw(c66.802,-3.175) 70.206,-3.175 70.206,-54.153 ; 3.124,-57.531 cw(c3.124,-54.127) -0.279,-54.127 -0.279,-3.175 cw(c3.124,-3.175) 3.124,0.229

## Text inside footprints (layer, text, board x,y; h text height)
P8: Top Overlay "2" at 64.073,-27.376 h1.27; Top Overlay "1" at 61.71,-27.274 h1.27; Top Overlay "7" at 61.761,-15.158 h1.27; Top Overlay "8" at 63.996,-15.082 h1.27
U4: Top Overlay "1" at 25.146,-41.402 h1.5; Top Overlay "15" at 5.918,-41.554 h1.5
U5: Top Overlay "3" at 8.85,-12.385 h1.5 r90; Top Overlay "1" at 8.85,-17.215 h1.5 r90; Top Overlay "2" at 8.85,-14.925 h1.5 r90